# EAGLE board Motion shield v1 (EAGLE 6.1)
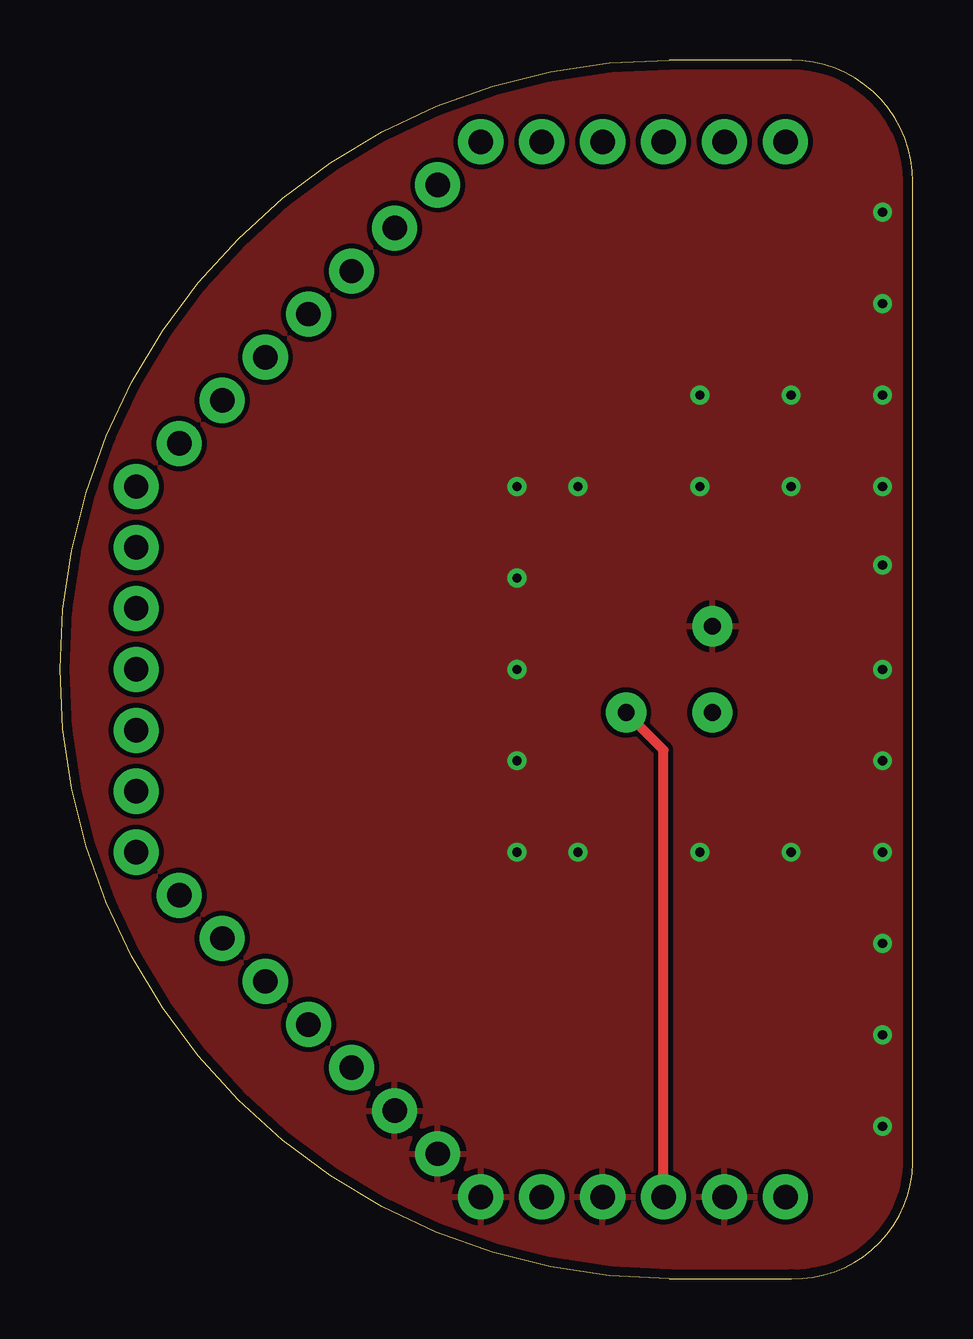
[diagram p0: board, top side]
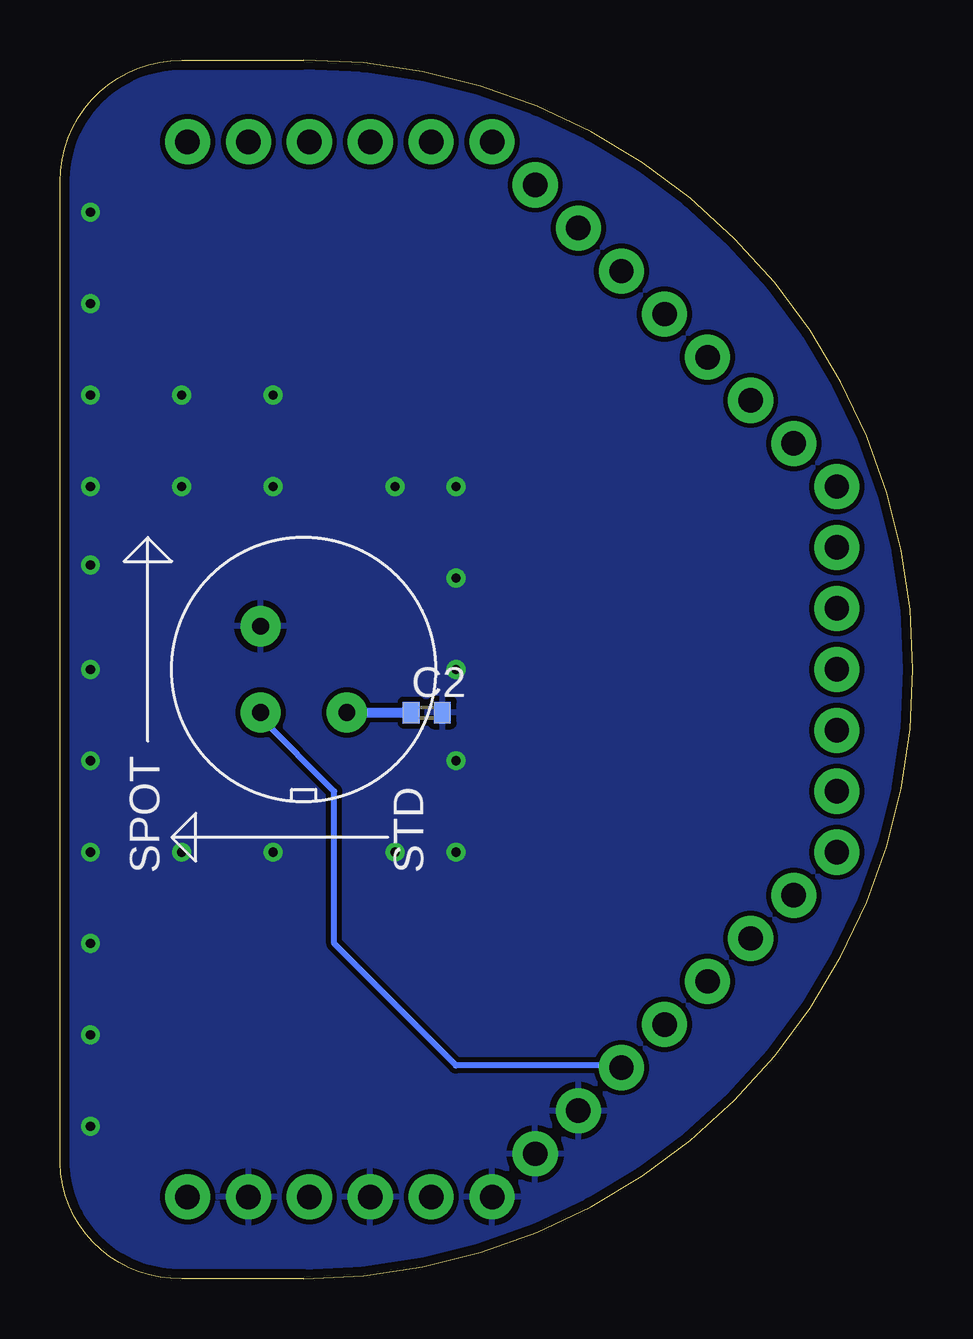
[diagram p1: board, bottom side, seen from below]

Size 35.56 x 50.8 mm. Coordinates in mm from the lower left corner, seen from the top.
Outline: 25.4,0 arc-180 25.4,50.8 30.48,50.8 arc-90 35.56,45.72 35.56,4.83 arc-90 30.48,0 25.4,0
Copper layers (1*16): Top 0.035mm / dielectric 1.5mm / Bottom 0.035mm
Design rules: minimum track width 6mil, minimum drill 15mil, track to track 6mil, track to pad 6mil, pad to pad 4mil, via to via 6mil, smd to smd 4mil, copper to edge 15mil, drill to drill 6mil, minimum pad ring 10mil, minimum via ring 8mil, stop-mask expansion 4mil, vias tented up to drill 25mil, thermal gap 10mil

## Footprints (pad centres in the part's own frame; a part is rotated, then mirrored left to right if it is on the bottom)
C0402 = smd 0.7 x 0.9: 1 -0.65,0; 2 0.65,0
#NEBULA-PTH@1 = drill 1.016 pad 1.88: 3.3V -25.637,-47.388; 5V -30.716,-47.388; A0 -36.848,-7.004; A1 -38.645,-8.8; A2 -40.44,-10.596; A3 -42.237,-12.392; A4 -47.625,-22.86; A5 -47.625,-25.4; A6 -40.44,-40.204; A7 -38.645,-42; BAT -20.557,-47.388; COM1_RX -25.636,-3.412; COM1_TX -23.096,-3.412; COM2_RX -47.625,-30.48; COM2_TX -47.625,-27.94; D0 -47.625,-20.32; D1 -47.625,-17.78; D2 -45.829,-15.984; D3 -44.032,-14.188; DAC1 -47.625,-33.02; DAC2 -45.829,-34.816; GND1 -36.848,-43.796; GND2 -35.052,-45.592; GND3 -33.256,-47.388; GND4 -28.177,-47.388; GND5 -23.097,-47.388; MCO -20.556,-3.412; T0 -28.176,-3.412; T1 -30.716,-3.412; T2 -33.256,-3.412; T3 -35.052,-5.208; TA0 -44.032,-36.612; TA1 -42.237,-38.408
PANASONIC-AMN41122 = drill 0.7 pad 1.676: GND 1.8,1.8; OUT -1.8,1.8; VCC -1.8,-1.8

## Placement (x,y rotation side)
C2  0.1uF  [C0402]  20.27,23.6 0 bottom
INFO2  Warren D Greenway and Evan Teitelman  [%CC-NC-SA]  -2.54,-10.16 0 top  (outside the outline)
LOGO1  #PYGMYLOGONORMAL  [#PYGMYLOGO]  27.94,13.72 90 bottom
NEBULA1  #NEBULAPTH  [#NEBULA-PTH@1]  50.8,50.8 0 top
U2  PANASONIC-AMN41122  [PANASONIC-AMN41122]  25.4,25.4 90 bottom

## Library data of the parts
C2 = rcl
INFO2 NEBULA1 = PygmyBoards
LOGO1 U2 = Pygmy

## Nets
3.3V: C2.1 NEBULA1.3.3V U2.VCC
5V: NEBULA1.5V
GND: C2.2 NEBULA1.GND1 NEBULA1.GND2 NEBULA1.GND3 NEBULA1.GND4 NEBULA1.GND5 U2.GND
SENSOR: NEBULA1.A7 U2.OUT

## Tracks (layer width: path | path; a pad name or v marks a point on that pad's centre or on a via)
3.3V
  Top 0.406: NEBULA1.3.3V 25.16,22.04 U2.VCC
  Bottom 0.203: 20.97,23.6 C2.1
  Bottom 0.406: U2.VCC 20.97,23.6
GND  (via drill 0.38)
  other vias: 34.29,10.16 30.48,36.83 19.05,21.59 26.67,17.78 19.05,25.4 19.05,17.78 21.59,33.02 34.29,44.45 34.29,40.64 34.29,36.83 34.29,33.02 34.29,29.74 34.29,25.4 34.29,21.59 34.29,17.78 34.29,13.97 30.48,33.02 21.59,17.78 19.05,29.21 34.29,6.35 26.67,36.83 30.48,17.78 19.05,33.02 26.67,33.02
  pour Bottom (isolate 0.203): -2.54,-2.54 38.1,-2.54 38.1,53.34 -2.54,53.34
  pour Top (isolate 0.203): -1.27,-1.27 36.83,-1.27 36.83,52.07 -1.27,52.07
SENSOR
  Bottom 0.254: U2.OUT 27.2,23.39 24.13,20.32 24.13,13.97 19.05,8.89 12.25,8.89 NEBULA1.A7

## Text on the board
tTest: SPOT | STD
bTest: Pygmy Motion Shield v1 | Warren D Greenway | Evan Teitelman | Designed By:
Document: Pygmy GasSensor Shield | Version 1 | Standard Grid: 50mil